# Altium PCB SCC_MPPT_ALTIUM_Footprint.pcbdoc
Units mm, origin at the board's own origin, x right, y up, seen from the top; angles counter-clockwise.
Board outline 4439.66 x 103.11 mm, 2 copper layers (Top Layer, Bottom Layer); 34 components, 53 nets, 106 pads, 19 vias.
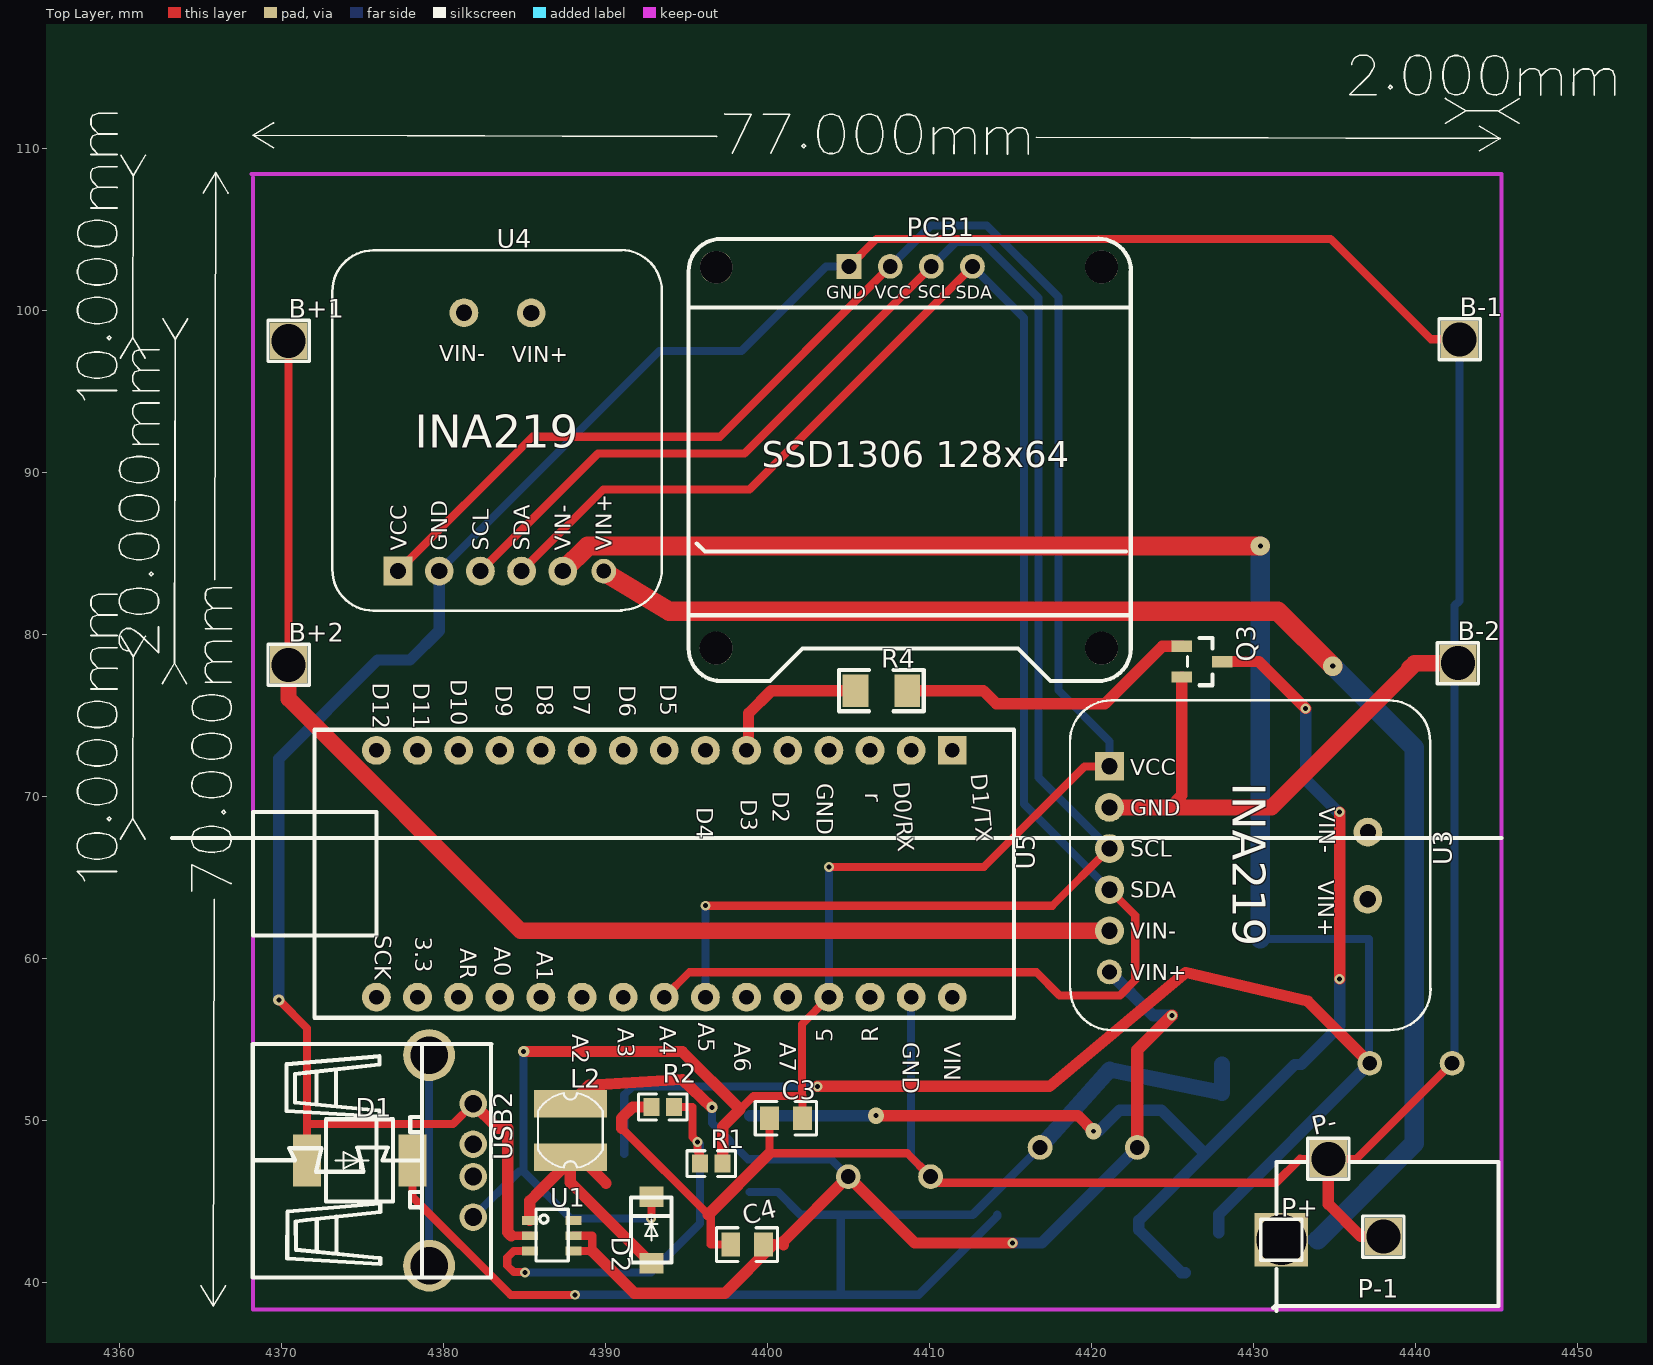
[diagram p0: Top Layer view]
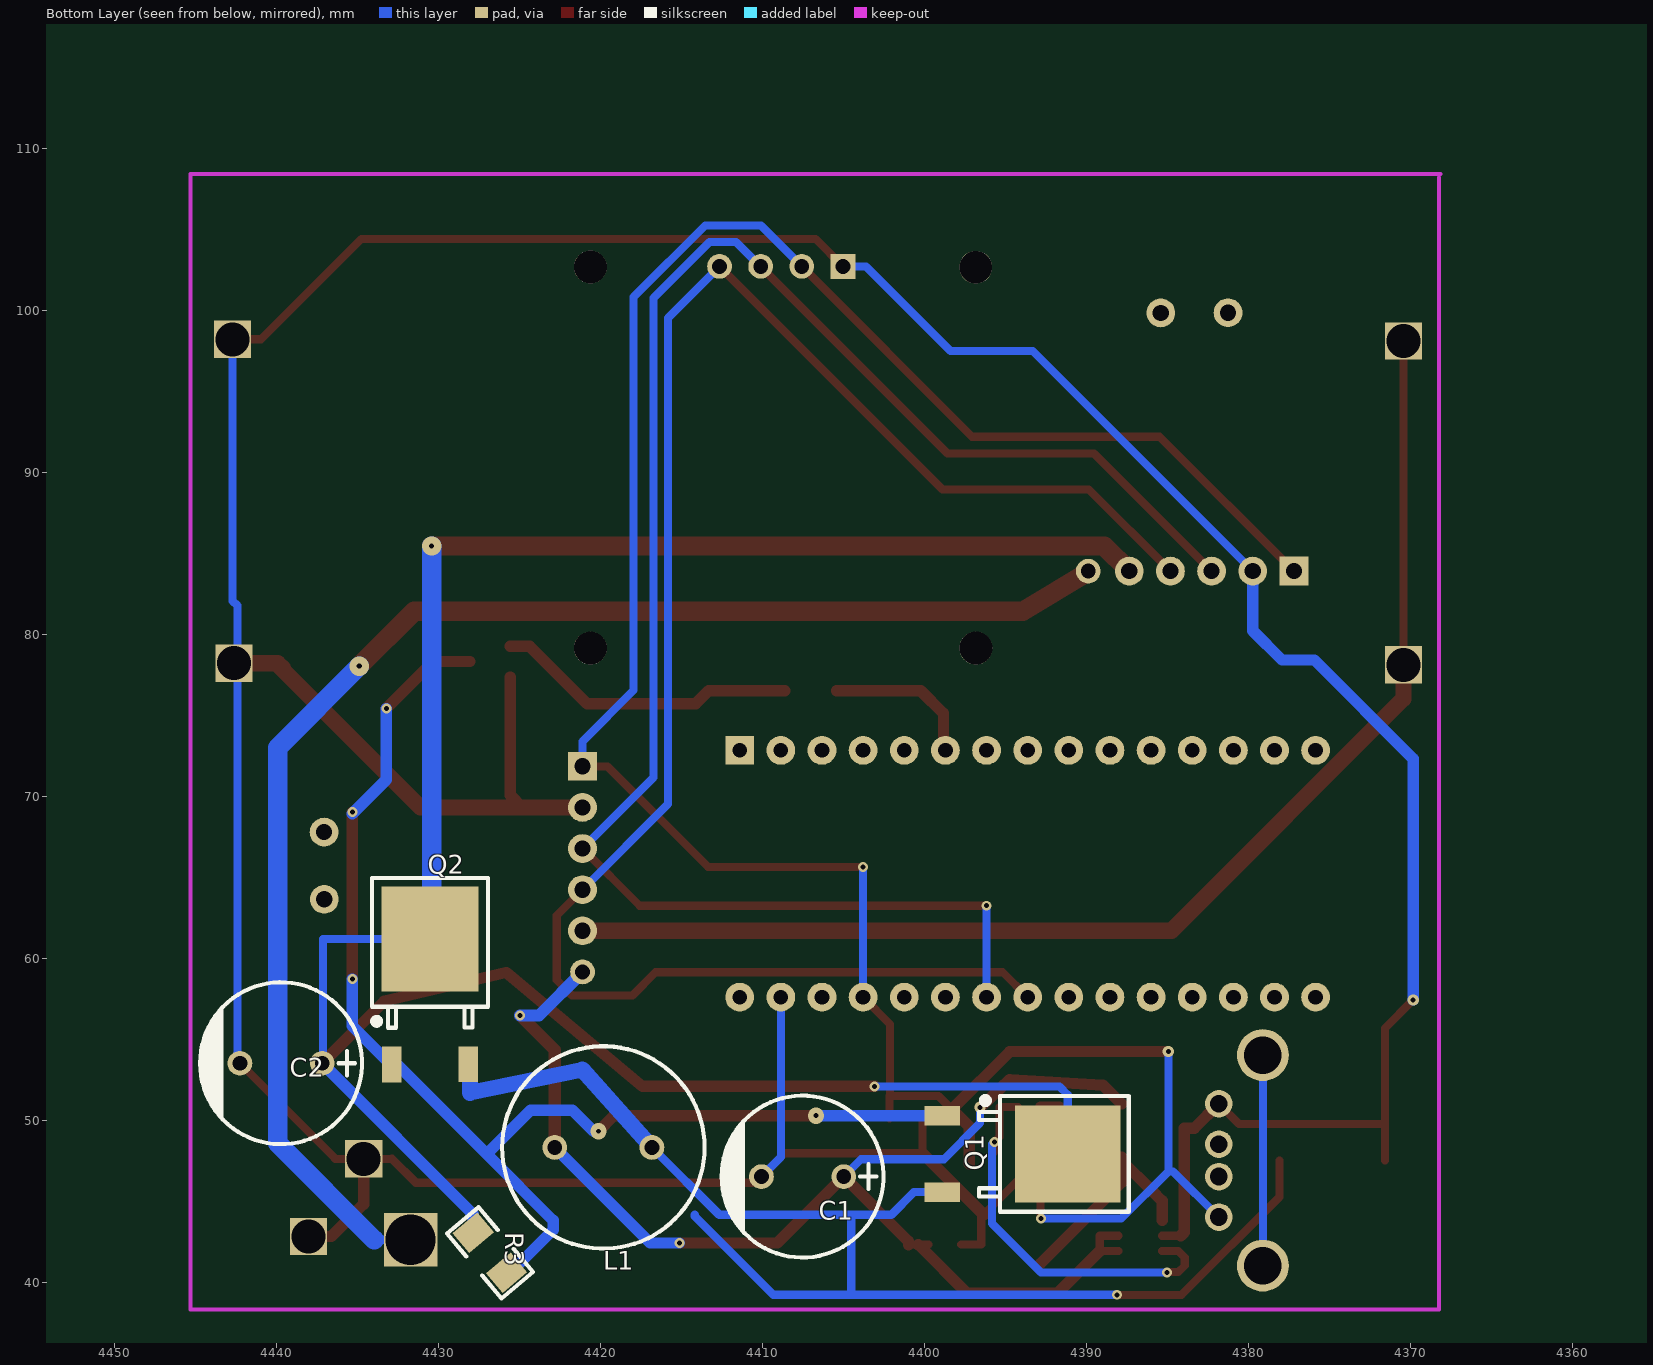
[diagram p1: Bottom Layer view, seen from below]

## Layer stack, top to bottom
Top Layer: signal copper (thickness not stored)
Dielectric: dielectric 0.32, FR-4, Dk 4.8
Bottom Layer: signal copper (thickness not stored)

## Board outline
4465.057,25.4 25.4,25.4 25.4,128.513 4465.057,128.513

## Components (designator, comment, footprint, x,y, rotation, side; value= is the part's Value field where it differs from the comment)
B+1 "B+" HDR-1X1/2.54#1 4370.426,98.127 r0 top
B+2 "B+" HDR-1X1/2.54#2 4370.426,78.127 r0 top
B-1 "B-" HDR-1X1/2.54#2 4442.725,98.227 r0 top
B-2 "B-" HDR-1X1/2.54#3 4442.626,78.227 r0 top
C1 "1000uF" CAP-D10.0XF5.0 4407.525,46.527 r180 bottom
C2 "1000uF" CAP-D10.0XF5.0 4439.725,53.527 r180 bottom
C3 "22u" 0805 4400.125,50.127 r0 top
C4 "22u" 0805 4397.725,42.327 r0 top
D1 "SS34" SMC(DO-214AB) 4374.825,47.527 r0 top
D2 "SS34" SMA(DO-214AC) 4392.825,43.327 r90 top
L1 "1000uH" DIP-L-12.5X14.5 4419.826,48.327 r180 bottom
L2 "22uH" CD43 4387.825,51.027 r0 top
P+ "P+" HDR-1X1/2.54#4 4431.726,42.627 r0 top
P- "P-" HDR-1X1/2.54#1 4434.626,47.627 r0 top
P-1 "Header-Male-2.54_1x1" HDR-1X1/2.54#5 4438.026,42.827 r0 top
PCB1 "SSD1306-128x64-OLED-SPI" SSD1306_ARDUINO 4395.126,77.127 r0 top
Q1 "AOD444" TO-252-2#1 4395.025,47.927 r90 bottom
Q2 "AOD444" TO-252-2#2 4430.526,57.327 r0 bottom
Q3 "MMBT2222A" SOT-23(SOT-23-3) 4426.825,78.327 r270 top
R1 "24k" 0603#1 4395.725,47.327 r0 top
R2 "3.3k" 0603#2 4392.725,50.827 r0 top
R3 "10k" 1206#1 4426.827,41.827 r50 bottom
R4 "4.7K" 1206#2 4407.025,76.527 r0 top
U1 "MT3608" SOT-23-6 4385.325,43.827 r0 top
U3 "PanelSensor" INA219-AURDINO#1 4418.826,75.927 r270 top
U4 "INA219" INA219-AURDINO#2 4373.126,81.627 r0 top
U5 "ARDUINO_NANO" ARDUINO_NANO 4393.626,65.227 r270 top
USB2 "USBA/F90°" USB-M-46 4381.826,47.527 r270 top
? "" ? 4406.726,110.9 r0 top
? "" ? 4365.675,73.527 r0 top
? "" ? 4362.078,88.227 r0 top
? "" ? 4359.485,103.333 r0 top
? "" ? 4359.485,73.633 r0 top
? "" ? 4444.13,113.659 r0 top

## Footprints (in the part's own frame and the unit in brackets; to place one, negate y for a bottom-side part, rotate by r counter-clockwise, add the part's x,y. Pads: shape width x height; smd on the part's side, far side on the other; paste and mask are expansions set on the pad)
0603#1 [mm]
  rect 0.998x1.1 smd: 1(0.102,0) 2(1.502,0)
  silkscreen extent -0.7,-0.8 2.3,0.8
0603#2 [mm]
  rect 0.998x1.1 smd: 1(0.1,0) 2(1.499,0)
  silkscreen extent -0.7,-0.8 2.3,0.8
0805 [mm]
  rect 1.158x1.471 smd: 1(-0.002,-0.001) 2(2.03,-0.001)
  silkscreen extent -0.88,-1.04 2.89,1.04
1206#1 [mm]
  rect 1.6x2 smd: 1(1.6,0) 2(-1.6,0)
  silkscreen extent -2.62,-1.27 2.61,1.27
1206#2 [mm]
  rect 1.6x2 smd: 1(-1.6,0) 2(1.6,0)
  silkscreen extent -2.61,-1.27 2.62,1.27
ARDUINO_NANO [mil]
  rect 70x70 hole 36: 1(-300.05,700.02)
  round 70 hole 36: 2(-300,600) 3(-300,500) 4(-300,400) 5(-300,300) 6(-300,200) 7(-300,100) 8(-300,0) 9(-300,-100) 10(-300,-200) 11(-300,-300) 12(-300,-400) 13(-300,-500) 14(-300,-600) 15(-300,-700) 16(300,-700) 17(300,-600) 18(300,-500) 19(300,-400) 20(300,-300) 21(300,-200) 22(300,-100) 23(300,0) 24(300,100) 25(300,200) 26(300,300) 27(300,400) 28(300,500) 29(300,600) 30(300,700)
  silkscreen extent -350,-1000 350,850
CAP-D10.0XF5.0 [mil]
  round 60 hole 36: 1(100,0) 2(-100,0)
  silkscreen extent -200,-197 197,197
CD43 [mm]
  rect 4.501x1.699 smd: 1(0,-0.001) 2(0,-3.301)
  silkscreen extent -2,-3.95 2,0.65
DIP-L-12.5X14.5 [mil]
  round 60 hole 36: 1(118.1,0.01) 2(-118.12,0.01)
  silkscreen extent -246,-246 246,246
HDR-1X1/2.54#1 [mil]
  rect 90.6x90.5 hole 82.68: 1(0.01,0.03)
  silkscreen extent -50,-50 50,50
HDR-1X1/2.54#2 [mil]
  rect 90.6x90.6 hole 82.68: 1(0.01,-0.02)
  silkscreen extent -50,-50 50,50
HDR-1X1/2.54#3 [mil]
  rect 90.5x90.5 hole 82.68: 1(-0.06,-0.01)
  silkscreen extent -50,-50 50,50
HDR-1X1/2.54#4 [mil]
  rect 130x129.9 hole 122.05: 1(0.02,-0.03)
  silkscreen extent -50,-50 50,50
HDR-1X1/2.54#5 [mil]
  rect 90.6x90.6 hole 82.68: 1(-0.01,0.04)
  silkscreen extent -50,-50 50,50
INA219-AURDINO#1 [mil]
  rect 70x70 hole 39.4: 1(160.11,90)
  round 70 hole 39.4: 2(260.01,90) 3(360.01,90) 4(460.01,90) 5(560.01,90) 7(483.41,717.7) 8(320.01,718.1)
  round 60 hole 36: 6(660.01,90)
  silkscreen extent 0,-6 801,871
INA219-AURDINO#2 [mil]
  rect 70x70 hole 39.4: 1(160.01,90.08)
  round 70 hole 39.4: 2(260,90) 3(360,90) 4(460,90) 5(560,90) 7(483.4,717.7) 8(320,718.1)
  round 60 hole 36: 6(660,90)
  silkscreen extent 0,-6 801,871
SMA(DO-214AC) [mm]
  rect 1.27x1.471 smd: 1(-2.158,0) 2(1.957,0)
  silkscreen extent -2.09,-1.25 1.91,1.25
SMC(DO-214AB) [mil]
  rect 67.9x126 smd: 1(-128.45,-0.01) 2(128.35,-0.01)
  silkscreen extent -82,-100 81,100
SOT-23(SOT-23-3) [mm]
  rect 0.701x1.25 smd: 1(-0.95,-1.251) 2(0.95,-1.251) 3(0,1.249)
  silkscreen extent -1.46,-0.9 1.46,0.65
SOT-23-6 [mm]
  rect 1.001x0.551 smd: 1(-0.002,0) 2(-0.002,-0.95) 3(-0.002,-1.9) 4(2.698,-1.9) 5(2.698,-0.95) 6(2.698,0)
  silkscreen extent 0.38,-2.51 2.36,0.69
SSD1306_ARDUINO [mil]
  rect 60x60 hole 36: 1(389.97,1007.85)
  round 60 hole 36: 2(490.01,1007.9) 3(590.01,1007.9) 4(690.01,1007.9)
  round 80 hole 80 unplated: ""(66.91,80) ""(67.21,1005.9) ""(1003.91,80) ""(1003.91,1006.5)
  silkscreen extent 0,0 1075,1075
TO-252-2#1 [mm]
  rect 1.199x2.2 smd: 1(2.363,3.874) 3(-2.361,3.869)
  rect 5.999x6.5 smd: 4(0.001,-3.877)
  silkscreen extent -3.57,-7.64 3.57,1.61
TO-252-2#2 [mm]
  rect 1.201x2.2 smd: 1(2.363,3.877) 3(-2.362,3.872)
  rect 5.999x6.5 smd: 4(-0.001,-3.877)
  silkscreen extent -3.57,-7.64 3.57,1.61
USB-M-46 [mm]
  round 3.2 hole 2.3: 0(-6.5,-2.72) 0(6.5,-2.72)
  round 1.7 hole 1.1: 1(3.5,0) 2(1.001,0) 3(-1.001,0) 4(-3.5,0)
  silkscreen extent -7.18,-13.61 7.23,1.11
? [mm]
  silkscreen extent -38.5,-1.24 38.5,1.24

## Via types
v1: diameter 0.61, hole 0.31, Top Layer to Bottom Layer, 9 vias
v2: diameter 0.62, hole 0.305, Top Layer to Bottom Layer, 3 vias
v3: diameter 1.2, hole 0.31, Top Layer to Bottom Layer, 2 vias
v4: diameter 0.7, hole 0.31, Top Layer to Bottom Layer, 2 vias
v5: diameter 1, hole 0.305, Top Layer to Bottom Layer, 2 vias
v6: diameter 0.7, hole 0.305, Top Layer to Bottom Layer, 1 vias

## Nets (pads, with @x,y where several pads share a name; then routed paths per layer and width w, separated by ;. In a path a pad name is that pad's centre, name@x,y a point inside that pad or via, vN(x,y) a via of type N, cw(c..) or ccw(c..) an arc to the next point about the centre after c; other vN are vias at no path point)
5V+: C3.2 D2.2 PCB1.2 R1.2 U3.1 U4.1 U5.27 USB2.1 | length 162.8
  Top Layer w0.5: U4.1@4377.19,83.913 4385.486,92.208 4397.053,92.208 PCB1.2@4407.571,102.726 ; v1(4392.801,43.938) 4392.826,43.963 4392.826,43.996 D2.2 ; 4398.297,50.682 4399.13,51.515 4402.156,51.515 ; C3.2@4402.156,50.125 4402.156,51.515 ; U5.27@4403.786,57.606 4402.115,55.937 4402.115,51.555 4402.156,51.515 ; v1(4403.786,65.642) 4413.352,65.642 4419.57,71.86 U3.1
  Top Layer w0.7: v4(4384.94,54.253) 4394.724,54.253 4398.297,50.682 4397.225,49.61 R1.2@4397.225,47.326
  Bottom Layer w0.5: USB2.1 4384.642,46.844 4384.94,46.844 ; v4(4384.94,54.253) 4384.94,46.844 ; v1(4392.801,43.938) 4387.845,43.938 4384.94,46.844 ; U5.27@4403.786,57.606 v1(4403.786,65.642) ; PCB1.2@4407.571,102.726 4410.096,105.251 4413.535,105.251 4417.957,100.829 4417.957,76.557 4421.112,73.402 U3.1
B+: C1.1 C4.2 L1.2 L2.1 U1.4 U1.5 U3.6 | length 80.5
  Top Layer w0.5: U1.4@4388.023,41.926 4389.176,41.926 4389.176,42.876 U1.5@4388.023,42.876 ; C4.2@4399.758,42.325 4400.373,42.325 4400.987,42.325
  Top Layer w0.7: L2.1@4387.825,51.025 4388.971,52.173 4394.726,52.527 4396.547,50.806 v4(4396.564,50.806) ; 4389.176,41.926 4391.775,39.328 4397.37,39.328 4400.373,42.325 ; 4400.987,42.325 4400.987,42.531 4404.985,46.526 4409.084,42.427 v1(4415.126,42.427)
  Top Layer w0.75: L1.2 4422.826,54.338 v1(4424.973,56.485)
  Bottom Layer w0.5: v4(4396.564,50.806) 4396.564,49.832 4398.795,47.601 4403.911,47.601 C1.1@4404.985,46.526
  Bottom Layer w0.7: v1(4415.126,42.427) 4416.926,42.427 L1.2
  Bottom Layer w0.75: U3.6 4423.79,56.485 v1(4424.973,56.485)
CHG-: B+1.1 B+2.1 U3.5 | length 78.7
  Top Layer w0.5: B+2.1@4370.426,78.525 B+1.1@4370.426,98.126
  Top Layer w1: B+2.1@4370.426,78.525 4370.426,76.023 4384.746,61.703 U3.5
GND: B-1.1 B-2.1 C1.2 C2.2 C3.1 C4.1 D1.1 P-1.1 P-.1 PCB1.1 Q3.2 R2.1 U1.2 U3.2 U4.2 U5.29 USB2.4 | length 302.3
  Top Layer w0.5: v6(4369.826,57.427) 4371.564,55.689 4371.564,49.78 ; D1.1 4371.564,49.78 ; USB2.4 4380.578,49.78 4371.564,49.78 ; 4384.172,42.876 U1.2@4385.323,42.876 ; 4390.987,49.523 4396.336,44.177 4396.494,44.019 4396.494,42.325 C4.1@4397.726,42.325 ; C3.1@4400.124,50.125 4400.124,47.966 4408.628,47.966 C1.2@4410.065,46.526 ; PCB1.1 4406.735,104.431 4434.769,104.431 4440.972,98.228 B-1.1 ; 4432.874,47.626 4434.627,47.626 4435.503,47.626 4436.38,47.626 4436.38,47.641 C2.2@4442.265,53.527
  Top Layer w0.52: C1.2@4410.065,46.526 4410.431,46.161 4431.409,46.161 4432.874,47.626
  Top Layer w0.7: USB2.4 4383.329,49.523 4383.962,49.523 4383.962,43.087 4384.172,42.876 ; 4390.987,49.523 4390.987,50.141 4391.673,50.827 R2.1@4392.826,50.827 ; 4396.336,44.177 4400.124,47.966 ; 4424.826,69.323 4425.575,70.073 Q3.2@4425.575,77.377 ; 4434.626,44.827 4436.626,42.827 P-1.1 ; 4434.626,44.827 P-.1
  Top Layer w1: U3.2 4431.122,69.323 4439.826,78.027 4439.726,78.027 4439.626,77.927 4439.925,78.226 B-2.1
  Bottom Layer w0.5: U4.2@4379.73,83.913 4393.311,97.494 4398.384,97.494 4403.616,102.726 PCB1.1 ; U5.29@4408.866,57.606 4408.866,47.728 C1.2@4410.065,46.526 ; C2.2@4442.265,53.527 4442.425,53.687 4442.425,80.026 4442.425,80.903 4442.425,81.779 4442.725,82.079 B-1.1
  Bottom Layer w0.7: v6(4369.826,57.427) 4369.826,72.327 4375.926,78.427 4377.926,78.427 4379.726,80.227 4379.726,83.909 U4.2
PWM: R4.1 U5.6 | length 9.5
  Top Layer w0.7: U5.6 4398.826,72.967 4398.826,75.127 4400.226,76.527 R4.1
Q1_1: Q1.1 Q2.1 Q3.3 R3.2 | length 79.1
  Top Layer w0.7: v5(4406.689,50.291) 4419.162,50.291 v5(4420.126,49.327) ; Q3.3@4428.075,78.327 4430.325,78.327 v2(4433.226,75.427) ; v2(4435.326,58.727) v2(4435.326,69.027)
  Bottom Layer w0.7: Q1.1 v5(4406.689,50.291) v5@4406.726,50.327 ; v5(4420.126,49.327) 4420.426,49.327 4421.726,50.627 4424.326,50.627 4427.026,47.927 ; R3.2 4425.551,40.601 4422.926,43.227 4422.926,43.827 4427.026,47.927 ; v2(4433.226,75.427) 4433.226,71.027 v2@4435.326,68.927 ; v2(4435.326,58.727) 4435.326,55.827 4432.949,53.451 4432.888,53.451 4432.549,53.451 4427.026,47.927
Q1_3: D1.2 L1.1 Q1.3 Q2.3 | length 83.4
  Top Layer w0.5: D1.2 4378.087,45.274 4384.131,39.229 v1(4388.114,39.229)
  Bottom Layer w0.5: Q1.3 4400.647,45.566
  Bottom Layer w0.52: v1@4388.115,39.229 4409.326,39.226 4414.17,44.07 4414.17,44.172 ; 4400.647,45.566 4402.041,44.172 4412.67,44.172 L1.1 ; 4404.525,39.227 4404.525,44.172
  Bottom Layer w1: L1.1 4421.126,53.127 4428.064,51.703 Q2.3@4428.064,53.455
Q3_1: Q3.1 R4.2 | length 18.8
  Top Layer w0.7: R4.2 4413.325,76.527 ; 4413.326,76.527 4414.126,75.727 4420.826,75.727 4424.376,79.277 Q3.1@4425.575,79.277
S$67: 
S$69: 
S$483: 
S$559: 
S$563: 
S$565: 
SOLAR+: P+.1 U4.6 | length 89.4
  Top Layer w1.2: U4.6@4389.89,83.913 4389.826,83.913 4393.926,81.427 4431.512,81.427 v3(4434.896,78.043)
  Bottom Layer w0.5: P+.1 4433.979,42.627
  Bottom Layer w1.2: 4433.979,42.627 4439.925,48.574 4439.925,73.013 v3(4434.896,78.043)
SOLAR-: C2.1 Q1.4 Q2.4 R3.1 U4.5 | length 151
  Top Layer w0.7: v1(4403.073,52.097) 4417.408,52.097 4425.826,59.127 4433.344,57.37 C2.1@4437.185,53.527
  Top Layer w1.2: U4.5@4387.35,83.913 4388.902,85.464 v3(4430.426,85.464)
  Bottom Layer w0.5: Q1.4 4391.15,51.581 4391.665,52.097 v1(4403.073,52.097) ; Q2.4@4430.426,61.205 4434.076,61.205 4437.126,61.205 4437.126,53.585 C2.1@4437.185,53.527
  Bottom Layer w0.7: R3.1 4427.854,44.196 C2.1
  Bottom Layer w1.2: Q2.4@4430.426,61.205 v3(4430.426,85.464)
U1_1: D2.1 L2.2 U1.1 | length 16.4
  Top Layer w0.7: U1.1@4385.325,43.828 4385.325,45.026 4385.926,45.627 4387.825,47.526 L2.2@4387.825,47.728 ; 4390.026,46.127 4388.425,47.728 L2.2@4387.825,47.728 ; D2.1 4387.825,46.168 L2.2@4387.825,47.728
U1_3: R1.1 R2.2 U1.3 | length 25.3
  Top Layer w0.5: v1(4385.022,40.597) 4384.992,40.627 4384.326,40.627 4383.926,41.027 4383.926,41.527 4384.326,41.928 U1.3@4385.325,41.928 ; R2.2@4394.226,50.827 4395.376,50.827 4395.376,48.98 v1(4395.684,48.673) 4395.684,48.071 4395.826,47.928 R1.1@4395.826,47.326
  Bottom Layer w0.5: v1(4385.022,40.597) 4392.796,40.597 4395.826,43.627 4395.826,48.531 v1(4395.684,48.673)
U1_6: U1.6
U3_3: PCB1.3 U3.3 U4.3 U5.24 | length 112.2
  Top Layer w0.5: U4.3@4382.27,83.913 4389.539,91.185 4398.569,91.185 PCB1.3@4410.111,102.726 ; v1(4396.166,63.252) 4417.581,63.252 U3.3
  Bottom Layer w0.5: U5.24@4396.166,57.606 v1(4396.166,63.252) ; PCB1.3@4410.111,102.726 4411.625,104.24 4413.268,104.24 4416.735,100.773 4416.735,71.159 U3.3
U3_4: PCB1.4 U3.4 U4.4 U5.23 | length 114.6
  Top Layer w0.5: U4.4@4384.81,83.913 4389.854,88.96 4398.884,88.96 PCB1.4@4412.651,102.726 ; U5.23@4393.626,57.606 4395.168,59.148 4416.606,59.148 4418.033,57.72 4421.749,57.72 4422.702,58.675 4422.702,62.653 U3.4
  Bottom Layer w0.5: PCB1.4@4412.651,102.726 4415.831,99.546 4415.831,69.523 U3.4
U3_7: U3.7
U3_8: U3.8
U4_7: U4.7
U4_8: U4.8
U5_1: U5.1
U5_2: U5.2
U5_3: U5.3
U5_4: U5.4
U5_5: U5.5
U5_7: U5.7
U5_8: U5.8
U5_9: U5.9
U5_10: U5.10
U5_11: U5.11
U5_12: U5.12
U5_13: U5.13
U5_14: U5.14
U5_15: U5.15
U5_16: U5.16
U5_17: U5.17
U5_18: U5.18
U5_19: U5.19
U5_20: U5.20
U5_21: U5.21
U5_22: U5.22
U5_25: U5.25
U5_26: U5.26
U5_28: U5.28
U5_30: U5.30
USB2_0: USB2.0 | length 13
  Bottom Layer w0.5: USB2.0@4379.105,41.027 USB2.0@4379.105,54.027
USB2_2: USB2.2
USB2_3: USB2.3
pads on no net: PCB1.

## Silkscreen, mask and mechanical layers (free items; w line width, h text height)
Top Overlay:
  lines w0.254 net S$483: 4363.226,67.427 4445.326,67.427
  lines w0.254 net S$559: 4431.426,38.227 4431.426,40.827
  lines w0.254 net S$563: 4431.426,44.227 4431.426,47.427 4433.226,47.427
  lines w0.254 net S$565: 4431.226,38.427 4431.326,38.527 4445.126,38.527 4445.126,47.427 4435.926,47.427

## Text inside footprints (layer, text, board x,y; h text height)
PCB1: Top Overlay "VCC" at 4406.627,100.73 h0.8; Top Overlay "GND" at 4403.625,100.727 h0.8; Top Overlay "SCL" at 4409.276,100.75 h0.8; Top Overlay "SDA" at 4411.626,100.74 h0.8; Top Overlay "SSD1306 128x64" at 4399.627,90.327 h1.6
U3: Top Overlay "INA219" at 4428.732,70.847 h2.03 r270; Top Overlay "VCC" at 4422.382,71.32 h1; Top Overlay "GND" at 4422.382,68.823 h1; Top Overlay "SCL" at 4422.382,66.283 h1; Top Overlay "SDA" at 4422.382,63.743 h1; Top Overlay "VIN-" at 4422.382,61.203 h1; Top Overlay "VIN+" at 4422.382,58.663 h1; Top Overlay "VIN+" at 4434.01,64.84 h1 r270; Top Overlay "VIN-" at 4434.074,69.323 h1 r270
U4: Top Overlay "VCC" at 4377.733,85.183 h1 r90; Top Overlay "GND" at 4380.23,85.183 h1 r90; Top Overlay "SCL" at 4382.77,85.183 h1 r90; Top Overlay "SDA" at 4385.31,85.183 h1 r90; Top Overlay "VIN-" at 4387.85,85.183 h1 r90; Top Overlay "VIN+" at 4390.39,85.183 h1 r90; Top Overlay "VIN+" at 4384.213,96.812 h1; Top Overlay "VIN-" at 4379.73,96.875 h1
U5: Top Overlay "D1/TX" at 4412.559,71.383 h1.02 r275; Top Overlay "GND" at 4408.358,54.813 h1.02 r270; Top Overlay "5" at 4404.04,54.813 h1.02 r90; Top Overlay "D12" at 4375.634,77.026 h1.02 r270; Top Overlay "VIN" at 4410.898,54.813 h1.02 r270; Top Overlay "SCK" at 4375.733,61.427 h1.02 r270; Top Overlay "GND" at 4403.034,70.827 h1.02 r270; Top Overlay "D0/RX" at 4407.758,70.892 h1.02 r274; Top Overlay "r" at 4406.033,70.228 h1.02 r270; Top Overlay "D2" at 4400.334,70.327 h1.02 r270; Top Overlay "D3" at 4398.334,69.827 h1.02 r270; Top Overlay "D4" at 4395.634,69.327 h1.02 r270; Top Overlay "D5" at 4393.372,76.921 h1.02 r270; Top Overlay "D6" at 4390.832,76.875 h1.02 r270; Top Overlay "D7" at 4388.038,76.921 h1.02 r270; Top Overlay "D8" at 4385.752,76.921 h1.02 r270; Top Overlay "D9" at 4383.212,76.875 h1.02 r270; Top Overlay "D10" at 4380.434,77.227 h1.02 r270; Top Overlay "D11" at 4378.134,77.027 h1.02 r270; Top Overlay "3.3" at 4378.233,61.327 h1.02 r270; Top Overlay "AR" at 4381.033,60.628 h1.02 r270; Top Overlay "A0" at 4383.134,60.727 h1.02 r270; Top Overlay "A1" at 4385.734,60.427 h1.02 r270; Top Overlay "A2" at 4387.934,55.327 h1.02 r270; Top Overlay "A3" at 4390.734,55.727 h1.02 r270; Top Overlay "A4" at 4393.334,55.827 h1.02 r270; Top Overlay "A5" at 4395.735,56.027 h1.02 r270; Top Overlay "A6" at 4397.944,54.813 h1.02 r270; Top Overlay "A7" at 4400.738,54.813 h1.02 r270; Top Overlay "R" at 4406.834,54.813 h1.02 r90